# Altium PCB SAMV71_Xplained_Ultra.PcbDoc (part 6 of 7)
Units mm, origin at the board's own origin, x right, y up, seen from the top; angles counter-clockwise.
Board outline 90 x 135 mm, 8 copper layers (Top Layer LF-Signals, Ground Plane 1 (GND), Power Plane (VCC), Ground Plane 2 (GND), Signal Layer 1, Signal Layer 2, Ground Plane 3 (GND), Bottom Layer LF-Signals), stack 1.588 mm thick; 413 components, 342 nets, 1839 pads, 978 vias.
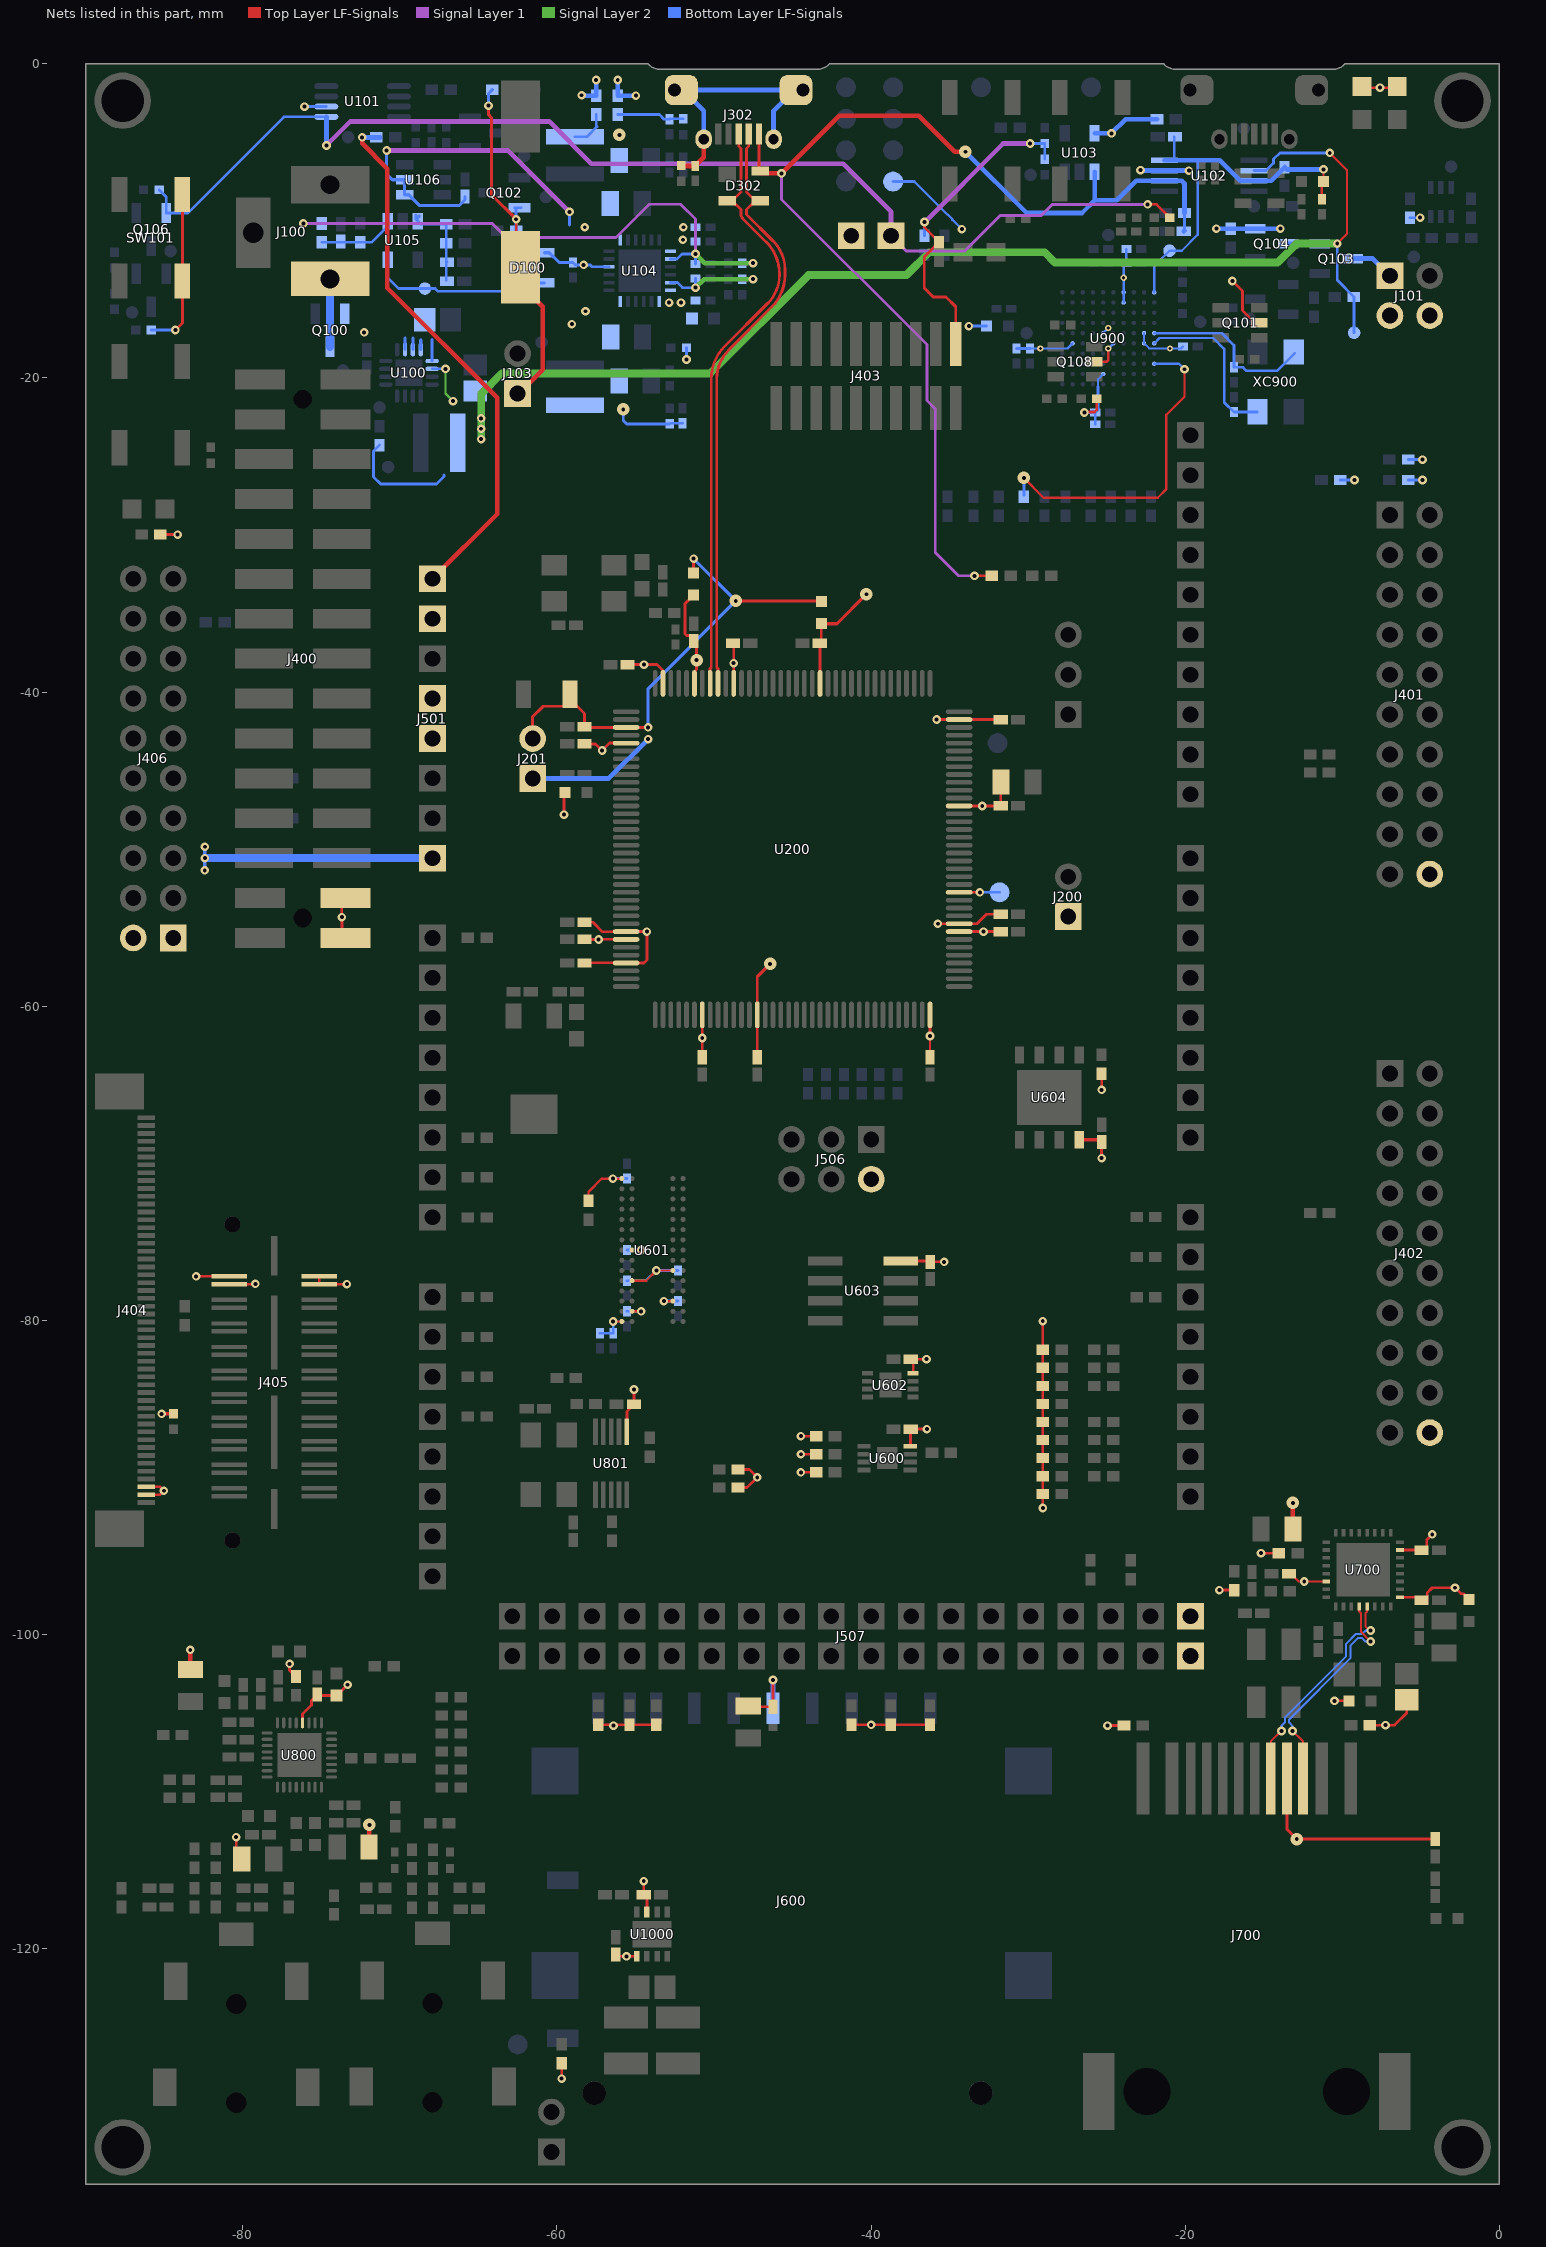
[diagram p12: the nets of this part, all layers, seen from the top]

## Via types
v1: diameter 0.55, hole 0.25, Top Layer LF-Signals to Bottom Layer LF-Signals, 557 vias
v2: diameter 0.55, hole 0.25, Top Layer LF-Signals to Bottom Layer LF-Signals, tented both sides, 190 vias
v3: diameter 0.55/0.55/0.55/0.8 (per signal layer), hole 0.25, Top Layer LF-Signals to Bottom Layer LF-Signals, tented top, 172 vias
v4: diameter 0.55, hole 0.25, Top Layer LF-Signals to Bottom Layer LF-Signals, tented top, 21 vias
v5: diameter 0.4, hole 0.2, Top Layer LF-Signals to Bottom Layer LF-Signals, tented both sides, 16 vias
v6: diameter 0.7, hole 0.35, Top Layer LF-Signals to Bottom Layer LF-Signals, 9 vias
v7: diameter 0.4, hole 0.2, Top Layer LF-Signals to Bottom Layer LF-Signals, tented top, 5 vias
v8: diameter 0.66, hole 0.33, Top Layer LF-Signals to Bottom Layer LF-Signals, tented top, 4 vias
v9: diameter 0.55/0.55/0.55/0.8 (per signal layer), hole 0.25, Top Layer LF-Signals to Bottom Layer LF-Signals, 2 vias
v10: diameter 0.4, hole 0.2, Top Layer LF-Signals to Bottom Layer LF-Signals, 2 vias

## Nets (pads, with @x,y where several pads share a name; then routed paths per layer and width w, separated by ;. In a path a pad name is that pad's centre, name@x,y a point inside that pad or via, vN(x,y) a via of type N, cw(c..) or ccw(c..) an arc to the next point about the centre after c; other vN are vias at no path point) (continued)
TARGET_USB_N: D302.3 J302.2 U200.136 | length 38.2
  Top Layer LF-Signals w0.175: -49.823,-38.437 -49.823,-20.036 cw(c-47.283,-20.036) -49.08,-18.239 -46.334,-15.494 ccw(c-48.376,-13.452) -45.488,-13.452 -45.488,-13.092 ccw(c-48.028,-13.092) -46.232,-11.296 -47.935,-9.593 -47.935,-9.286 D302.3@-47.465,-8.816 ; U200.136@-49.75,-39.45 U200.136@-49.75,-38.616 ; J302.2@-47.784,-4.475 -47.784,-5.238 -47.935,-5.389 -47.935,-8.17 -47.465,-8.641 -47.146,-8.641 D302.3@-47.059,-8.728
  Top Layer LF-Signals w0.18: -49.823,-38.437 -49.75,-38.51 U200.136@-49.75,-38.616
TARGET_USB_P: D302.2 J302.3 U200.137 | length 38.7
  Top Layer LF-Signals w0.175: U200.137@-50.25,-39.45 -50.25,-38.616 cw(c-49.999,-38.616) -50.176,-38.439 -50.176,-38.436 -50.176,-20.041 cw(c-47.288,-20.041) -49.331,-17.998 -46.58,-15.248 ccw(c-48.376,-13.452) -45.836,-13.452 -45.836,-13.381 ccw(c-48.724,-13.381) -46.682,-11.338 -48.181,-9.839 cw(c-47.935,-9.593) -48.283,-9.593 -48.283,-9.286 D302.2@-48.753,-8.816 ; D302.2@-48.873,-8.898 ccw(c-49.071,-9.096) -49.071,-8.816 D302.2@-49.159,-8.728 -49.071,-8.641 D302.2@-48.794,-8.641 ; D302.2@-48.753,-8.641 -48.283,-8.17 -48.283,-5.389 -48.434,-5.238 J302.3@-48.434,-4.475
  Top Layer LF-Signals w0.18: U200.137@-50.25,-38.616 -50.25,-38.51 -50.176,-38.436
TARGET_USB_SHIELD: C304.2 J302.6@-44.347,-1.675 J302.7@-52.522,-1.675 J302.8@-46.209,-4.8 J302.9@-50.659,-4.8 R304.2 | length 18.5
  Top Layer LF-Signals w0.3: R304.2@-52.1,-6.478 -52.075,-6.503 C304.2@-51.2,-6.503 -50.659,-5.962 J302.9@-50.659,-4.8
  Bottom Layer LF-Signals w0.3: J302.7@-52.522,-1.675 J302.6@-44.347,-1.675 ; J302.7@-52.042,-1.617 -50.659,-3 J302.9@-50.659,-4.8 ; J302.8@-46.209,-4.8 -46.209,-3 J302.6@-44.826,-1.617
TCT: C705.1 J700.4 | length 12.9
  Top Layer LF-Signals w0.175: J700.4@-13.525,-109.175 -13.525,-112.4 v3(-12.9,-113.025) C705.1@-4.075,-113.025
TRACESWO: R921.1 U900.A3 | length 21.1
  Top Layer LF-Signals w0.15: v3(-30.275,-26.368) -29.018,-27.625 -21.75,-27.625 -21.2,-27.075 -21.2,-22.347 -20.05,-21.197 v1(-20.05,-19.45)
  Bottom Layer LF-Signals w0.15: U900.A3@-21.975,-19.1 -20.4,-19.1 v1(-20.05,-19.45)
  Bottom Layer LF-Signals w0.175: R921.1@-30.275,-27.468 v3(-30.275,-26.368)
TST: TP200.1 U200.85 | length 2.6
  Top Layer LF-Signals w0.175: U200.85@-34.4,-52.75 v1(-33.075,-52.75)
  Bottom Layer LF-Signals w0.175: v1(-33.075,-52.75) TP200.1@-31.825,-52.75
TX_N: J700.5 U700.5 | length 14.2
  Top Layer LF-Signals w0.127: J700.5@-14.545,-109.175 -14.545,-106.812 v1(-13.875,-106.142) ; U700.5@-8.425,-98.225 -8.425,-98.538 -8.537,-98.65 -8.537,-99.475 -8.262,-99.75 v1(-8.2,-99.75)
  Bottom Layer LF-Signals w0.127: v1(-13.875,-106.142) -13.875,-105.817 -13.664,-105.605 -13.664,-105.298 -9.762,-101.396 -9.762,-100.594 -9.13,-99.961 -8.736,-99.961 -8.525,-99.75 v1(-8.2,-99.75)
TX_P: J700.3 U700.4 | length 14.5
  Top Layer LF-Signals w0.127: v1(-13.175,-106.142) -12.505,-106.812 J700.3@-12.505,-109.175 ; U700.4@-8.925,-98.225 -8.925,-98.538 -8.814,-98.65 -8.814,-99.836 v1(-8.2,-100.45)
  Bottom Layer LF-Signals w0.127: v1(-13.175,-106.142) -13.175,-105.817 -13.387,-105.605 -13.387,-105.412 -9.485,-101.511 -9.485,-100.708 -9.015,-100.238 -8.736,-100.238 -8.525,-100.45 v1(-8.2,-100.45)
V+: C125.2 R135.2 R136.1 U105.1 | length 5
  Bottom Layer LF-Signals w0.175: R136.1@-74.983,-11.369 -71.821,-11.369 -70.771,-10.319 U105.1@-70.771,-10.013
V-: C123.1 C124.2 R105.1 R111.2 U105.3 | length 6.1
  Bottom Layer LF-Signals w0.175: U105.3@-68.865,-10.013 -68.662,-10.217 R105.1@-67.058,-10.217 ; C123.1@-67.058,-12.571 C123.1@-67.008,-12.621 ; C124.2@-67.056,-13.784 R105.1@-67.056,-10.216
  Bottom Layer LF-Signals w0.18: U105.3@-68.967,-9.9 U105.3@-68.967,-9.617
  Bottom Layer LF-Signals w0.2: U105.3@-68.967,-9.9 U105.3@-68.767,-9.7
V_SUPERCAP: C103.1 D100.2 J103.1@-62.51,-20.987 Q102.2 R104.2 R108.2 | length 26.3
  Top Layer LF-Signals w0.175: C103.1@-62.666,-11.559 -62.6,-11.494 v1(-62.6,-9.9)
  Top Layer LF-Signals w0.2: v1(-64.356,-2.665) -64.356,-3.25 -64.179,-3.427 -64.179,-8.321 v1(-62.6,-9.9)
  Top Layer LF-Signals w0.3: J103.1@-62.51,-20.987 -62.414,-20.987 -60.904,-19.477 -60.904,-15.459 -62.325,-14.037 C103.1@-62.325,-12.95
  Bottom Layer LF-Signals w0.18: Q102.2@-62.298,-9.168 Q102.2@-62.398,-9.168 -62.685,-9.168 -62.6,-9.254 v1(-62.6,-9.9) R104.2@-62.6,-10.625 -62.6,-11.579 -61.798,-12.381 -61.798,-13.306 -61.148,-13.956 D100.2@-60.798,-13.956
  Bottom Layer LF-Signals w0.2: v1(-64.356,-2.665) -64.356,-1.889 R108.2@-64.118,-1.65
VBAT: J501.1@-67.93,-32.794 R112.1 | length 34.5
  Top Layer LF-Signals w0.3: v1(-72.402,-4.687) -72.402,-5.073 -70.8,-6.675 -70.8,-14.275 -63.8,-21.275 -63.8,-28.664 J501.1@-67.93,-32.794
  Bottom Layer LF-Signals w0.3: v1(-72.402,-4.687) -71.262,-4.687 R112.1@-71.25,-4.675
VCC_BACKUP_P3V3: J102.2 Q106.2 R106.2 R127.2 U101.1 | length 76.5
  Top Layer LF-Signals w0.175: v1(-22.4,-8.95) -21.825,-8.95 R106.2@-20.975,-9.8
  Signal Layer 1 w0.2: J102.2@-38.73,-10.95 -37.75,-11.93 -34.055,-11.93 -31.786,-9.662 -29.162,-9.662 -28.45,-8.95 v1(-22.4,-8.95)
  Signal Layer 1 w0.3: v1(-74.675,-5.2) -73.146,-3.671 -60.504,-3.671 -57.811,-6.364 -41.786,-6.364 -38.73,-9.42 J102.2@-38.73,-10.95
  Bottom Layer LF-Signals w0.175: R127.2@-85.325,-8.025 -84.875,-8.475 Q106.2@-84.875,-9.5 -83.5,-9.5 -77.375,-3.375 U101.1@-74.687,-3.375 ; v1@-74.687,-5.2 -74.687,-5.213 -74.675,-5.225 v1(-74.675,-5.2)
  Bottom Layer LF-Signals w0.3: U101.1@-74.687,-3.375 -74.675,-3.387 v1(-74.675,-5.2)
VCC_EDBG_P3V3: C909.1 C910.1 C911.1 C912.1 C913.1 C914.1 C915.1 D900.2 D901.2 L901.1 Q101.2 Q108.2 R141.2 R901.2 R902.2 R903.2 R906.2 R920.1 TP907.1 U900.B5 U900.B6 U900.D9 U900.D10 U900.E5 U900.F2 U900.F6 U900.J5 | length 36.9
  Top Layer LF-Signals w0.175: v2(-26.425,-22.2) -26.462,-22.162 -25.77,-22.162 -25.632,-22.024 R141.2@-25.632,-21.324 ; Q108.2@-25.807,-18.968 -25.018,-18.968 -24.9,-18.85 v5(-24.9,-18.125) ; v1(-17,-13.825) -16.35,-14.475 -16.35,-15.699 -15.553,-16.495 Q101.2@-15.287,-16.495 ; D900.2@-8.756,-1.518 v4(-7.6,-1.518) D901.2@-6.47,-1.518
  Bottom Layer LF-Signals w0.125: -27.972,-18.125 -27.5,-18.125 ; -25.55,-20.565 -25.55,-20.075 U900.F2@-25.225,-19.75 ; U900.B6@-22.625,-17.15 U900.B5@-22.625,-17.8 -22.3,-18.125 -21.828,-18.125
  Bottom Layer LF-Signals w0.15: -37.25,-7.5 -35.15,-9.6 -35.118,-9.6 -34.825,-9.893 -34.825,-9.925 v1(-34.225,-10.525) ; C913.1@-29.875,-18.125 v7(-29.225,-18.125) -27.972,-18.125 ; -27.5,-18.125 U900.J5@-27.175,-17.8 ; U900.D9@-23.925,-15.2 U900.D10@-23.925,-14.55 v10(-23.925,-13.625) -23.925,-12.875 C910.1@-23.75,-12.7 ; -21.828,-18.125 v7(-20.975,-18.125) -20.275,-18.125 C911.1@-20.15,-18
  Bottom Layer LF-Signals w0.175: TP907.1@-38.6,-7.5 -37.25,-7.5 ; v2(-33.775,-16.7) L901.1@-32.65,-16.7 ; C914.1@-30.75,-18.125 C913.1@-29.875,-18.125 ; v2(-26.425,-22.2) C912.1@-25.725,-22.2 ; C915.1@-25.725,-22.95 C912.1@-25.725,-22.2 ; -25.55,-20.565 -25.55,-22.025 C912.1@-25.725,-22.2 ; U900.F6@-25.225,-17.15 v5(-24.9,-16.825) ; v5(-24.9,-18.125) U900.E5@-24.575,-17.8 ; C910.1@-23.75,-12.7 C909.1@-23.75,-11.8 ; R901.2@-10.125,-26.5 v4(-9.225,-26.5) ; R903.2@-5.8,-26.5 v4(-4.9,-26.5) ; R902.2@-5.8,-25.2 v4(-4.9,-25.2) ; R906.2@-5.7,-9.8 v4(-5.05,-9.8)
  Bottom Layer LF-Signals w0.3: v1(-56.132,-1.03) R920.1@-56.132,-2.03 v1(-54.982,-2.03)
VCC_EDBG_USB_P5V0: C105.1 C908.1 L900.2 pad.3@-21,-11.9 R116.2 U102.3 U102.8 U900.A10 | length 24.5
  Top Layer LF-Signals w0.15: C908.1@-11.3,-8.625 -11.3,-7.6 L900.2@-11.2,-7.5 v4@-11.2,-6.775
  Bottom Layer LF-Signals w0.15: U900.A10@-21.975,-14.55 -21.975,-12.875 pad.3@-21,-11.9 -20.225,-11.9 -19.2,-10.875 -19.2,-6.15
  Bottom Layer LF-Signals w0.175: U102.8@-20.7,-6.15 C105.1@-20.7,-4.65
  Bottom Layer LF-Signals w0.3: U102.8@-21.325,-6.15 -20.7,-6.15 -19.2,-6.15 -17.8,-6.15 -16.5,-7.45 U102.3@-15.625,-7.45 -14.525,-7.45 R116.2@-13.675,-6.6 ; R116.2@-13.675,-6.575 -13.525,-6.725 v4(-11.2,-6.725)
VCC_EXT_P5V0: J101.1@-6.97,-13.49 Q103.3 | length 3
  Signal Layer 2 w0.3: J101.1@-6.97,-13.49 J101.1@-6.97,-13.35
  Bottom Layer LF-Signals w0.3: Q103.3@-9.35,-12.4 -8.068,-12.4 J101.1@-6.978,-13.49
VCC_EXT_P5V0_P14V0: C101.1 J405.40 J501.8@-67.93,-50.574 Q100.2 U100.10 U100.11 U100.12 U100.13 | length 21.6
  Top Layer LF-Signals w0.175: v4(-82.975,-77.2) J405.40@-80.87,-77.2
  Bottom Layer LF-Signals w0.2: v1(-82.425,-51.35) -82.425,-50.577 v1(-82.422,-50.574) v1(-82.422,-49.848) ; U100.10@-69.675,-18.2 -69.675,-17.45 ; U100.11@-69.175,-18.2 -69.175,-17.473 ; -68.685,-17.575 -68.675,-17.585 U100.12@-68.675,-18.2 ; U100.13@-67.95,-18.925 -67.95,-17.57
  Bottom Layer LF-Signals w0.5: v1(-82.422,-50.574) J501.8@-67.93,-50.574
  other v1: -72.275,-17.1
VCC_IN_P5V0: C100.1 L100.2 pad.3@-9.25,-17.125 Q103.2 Q104.3 R101.1 R115.2 U100.14 U102.2 | length 93.4
  Top Layer LF-Signals w0.15: v4(-10.8,-5.675) -9.7,-6.775 -9.7,-10.825 v4@-10.3,-11.425 ; v4@-10.475,-11.425 v4@-10.3,-11.425 ; v4(-10.325,-11.45) v4@-10.3,-11.425
  Signal Layer 2 w0.15: v1(-67.1,-19.425) -67.1,-21 v1(-66.625,-21.475)
  Signal Layer 2 w0.5: v1(-64.825,-23.9) v1(-64.825,-23.237) v1(-64.825,-22.575) -64.825,-21.025 -63.508,-19.708 -50.239,-19.708 -43.98,-13.45 -37.75,-13.45 -36.3,-12 -28.95,-12 -28.3,-12.65 -14.12,-12.65 -12.92,-11.45 v4(-10.325,-11.45)
  Bottom Layer LF-Signals w0.15: U100.14@-67.95,-19.425 v1(-67.1,-19.425)
  Bottom Layer LF-Signals w0.175: U102.2@-15.625,-6.8 -14.85,-6.8 -14.375,-6.325 -14.375,-6.075 -13.975,-5.675 v4(-10.8,-5.675) ; v4(-10.325,-11.45) -10.325,-13.775 -9.25,-14.85 pad.3@-9.25,-17.125
  Bottom Layer LF-Signals w0.18: R101.1@-71.3,-24.275 -71.675,-24.65 -71.675,-26.3 -71.225,-26.75 -67.675,-26.75 -67.2,-26.275 -67.2,-26.19
  Bottom Layer LF-Signals w0.3: Q104.3@-13.45,-11.45 Q103.2@-11.45,-11.45 v4(-10.325,-11.45)
VCC_MCU_P3V3: C200.1 C201.1 C202.1 C203.1 C204.1 C205.1 C206.1 C207.1 C216.1 J102.1 L200.1 U200.5 U200.30 U200.43 U200.72 U200.80 U200.96 U200.134 U200.143 | length 25.1
  Top Layer LF-Signals w0.15: C203.1@-36.25,-63.25 v1(-36.25,-61.9)
  Top Layer LF-Signals w0.18: v1(-59.55,-47.8) L200.1@-59.55,-46.4 ; C201.1@-58.25,-55.75 v1(-57.35,-55.75) -57.335,-55.735 -55.6,-55.735 U200.30@-55.6,-55.75 ; C200.1@-58.25,-43.3 -57.551,-43.3 v1(-57.128,-43.723) -56.656,-43.25 U200.5@-55.6,-43.25 ; C207.1@-55.5,-38.25 v1(-54.456,-38.25) -53.625,-38.25 -53.25,-38.625 U200.143@-53.25,-39.45 ; C202.1@-50.75,-63.25 v1(-50.75,-62.025) U200.43@-50.75,-60.55 ; U200.134@-48.75,-39.45 v1(-48.75,-38.162) C206.1@-48.75,-36.875 ; v1(-36.25,-61.9) U200.72@-36.25,-60.55 ; U200.80@-34.4,-55.25 v1(-32.85,-55.25) C204.1@-31.75,-55.25 ; U200.96@-34.4,-47.25 v1(-32.925,-47.25) C205.1@-31.75,-47.25 C216.1@-31.75,-45.75
VCC_P1V2: C120.1 C710.1 C711.1 C712.1 L701.1 R132.2 U104.23 U700.9 U700.30 | length 16.6
  Top Layer LF-Signals w0.15: C711.1@-13.4,-96.125 -13.275,-96.125 -12.775,-96.625 v1(-12.425,-96.625) U700.30@-11.025,-96.625
  Top Layer LF-Signals w0.175: U700.9@-6.325,-97.625 -5.15,-97.625 C710.1@-4.95,-97.825 -4.662,-97.825 -4.6,-97.887 -4.6,-97.35 -4.275,-97.025 v1(-2.825,-97.025) -2.45,-97.4 -2.3,-97.4 L701.1@-1.925,-97.775
  Top Layer LF-Signals w0.3: C712.1@-13.15,-93.275 v3(-13.15,-91.625)
  Signal Layer 2 w0.3: v1(-51.182,-14.255) -50.638,-13.711 v1(-47.519,-13.711)
  Bottom Layer LF-Signals w0.175: U104.23@-52.782,-13.93 -52.332,-13.93 -52.007,-14.255 v1(-51.182,-14.255) C120.1@-51.182,-13.661 ; R132.2@-48.207,-13.711 v1(-47.519,-13.711)
VCC_P1V8: C119.1 L805.1 L806.1 R128.2 R136.2 R819.1 U104.20 | length 40.6
  Top Layer LF-Signals w0.175: v1(-77.025,-101.875) -77.025,-102.275 R819.1@-76.625,-102.675
  Top Layer LF-Signals w0.3: v1(-83.35,-100.975) -83.35,-102.209 L806.1@-83.325,-102.234 ; L805.1@-71.959,-113.525 -71.959,-112.134 v3(-71.95,-112.125)
  Signal Layer 1 w0.175: v1(-76.15,-10.169) -64.12,-10.169 -63.231,-11.058 -56.239,-11.058 -54.131,-8.95 -52.121,-8.95 -51.182,-9.889 v1(-51.182,-12.105)
  Signal Layer 2 w0.3: v1(-51.182,-12.105) -50.594,-12.692 v1(-47.519,-12.692)
  Bottom Layer LF-Signals w0.175: v1(-76.15,-10.169) R136.2@-74.983,-10.169 ; U104.20@-52.782,-12.43 -52.357,-12.43 -52.032,-12.105 v1(-51.182,-12.105) C119.1@-51.182,-12.742 ; R128.2@-48.207,-12.692 v1(-47.519,-12.692)
VCC_P2V0: C114.1 C115.1 L101.2 R122.2 | length 4.5
  Bottom Layer LF-Signals w0.175: v3(-55.782,-22.005) -55.782,-22.705 -55.557,-22.93 R122.2@-52.832,-22.93 ; R122.2@-52.782,-22.88 C114.1@-52.007,-22.88
VCC_P3V3: C116.1 C117.1 L102.2 R100.1 R124.2 R920.2 | length 6.8
  Bottom Layer LF-Signals w0.175: L102.2@-58.857,-4.645 -58.097,-4.645 -57.457,-4.005 -57.507,-3.955 R100.1@-57.507,-3.23 ; R920.2@-56.132,-3.23 -53.482,-3.23 -53.182,-3.53 C116.1@-52.832,-3.53 ; C116.1@-52.832,-3.505 R124.2@-51.957,-3.505
  other v3: -56.032,-4.53
VCC_P5V0: C107.1 C108.1 C109.1 C110.1 C111.1 C112.1 C113.1 C121.1 C1002.1 D100.1 J101.3@-6.97,-16.03 J501.5@-67.93,-42.954 J506.2@-39.99,-71.021 J507.1 J507.2 Q104.2 R113.2 R114.2 R125.2 SW101.3 SW101.4 U102.7 U103.5 U104.1 U104.6 U104.10 U104.13 U104.19 U104.24 U106.4 U106.5 U1000.3 | length 50.7
  Top Layer LF-Signals w0.175: v1(-84.3,-16.95) -83.85,-16.5 SW101.3@-83.85,-13.825 SW101.4@-83.85,-8.325
  Top Layer LF-Signals w0.18: v1(-54.475,-115.705) C1002.1@-54.475,-116.58 -54.275,-116.78 U1000.3@-54.275,-117.668
  Signal Layer 1 w0.3: v1(-70.85,-5.525) -63.112,-5.525 v1(-59.207,-9.43)
  Bottom Layer LF-Signals w0.175: R125.2@-85.825,-16.95 v1(-84.3,-16.95) ; C108.1@-58.982,-12.655 -58.832,-12.805 v1(-58.307,-12.805) -57.882,-12.805 -57.757,-12.93 U104.10@-56.682,-12.93
  Bottom Layer LF-Signals w0.2: v1(-70.85,-5.525) -70.85,-7.02 -70.483,-7.387 U106.5@-69.699,-7.387 U106.4@-69.699,-8.337 -69.435,-8.337 -68.741,-9.03 -66.241,-9.03 -65.857,-8.646 C121.1@-65.857,-8.459 ; D100.1@-60.798,-12.031 -60.488,-12.031 -59.864,-12.655 C108.1@-58.982,-12.655 ; -59.207,-10.255 v1(-59.207,-9.43)
  Bottom Layer LF-Signals w0.3: U103.5@-25.772,-4.425 v1(-24.7,-4.425) -23.8,-3.525 R113.2@-21.8,-3.525 ; v1(-22.85,-6.775) -22.825,-6.8 U102.7@-21.325,-6.8 v1(-19.775,-6.8) ; v1(-18.025,-10.5) R114.2@-17.1,-10.5 Q104.2@-15.55,-10.5 v1(-13.95,-10.5)
  other v1: -59.057,-16.58 -58.182,-15.755 -52.857,-15.205 -52.107,-15.205 -51.982,-11.205 -58.232,-10.405 -51.957,-10.405
VCC_TARGET_P3V3: C600.1 C601.1 C602.1 C603.1 C604.1 C605.1 C606.1 C607.1 C608.1 C609.1 C610.1 C611.1 C612.1 C613.1 C702.1 C703.1 C818.1 C819.1 C822.1 C1003.1 J101.4@-4.43,-16.03 J200.1@-27.442,-54.295 J400.1@-73.467,-55.654 J400.3 J401.20@-4.43,-51.59 J402.20@-4.43,-87.15 J403.1 J404.48 J404.49 J405.37 J405.38 J405.39 J406.1@-84.44,-55.654 J406.2@-86.98,-55.654 J501.2@-67.93,-35.334 J501.4@-67.93,-40.414 J600.4 L700.1 L804.1 R100.2 R102.2 R120.1 R121.2 R134.2 R231.1 R232.1 R302.2 R303.2 R404.1 R600.2 R601.2 R602.2 R604.1 R605.1 R606.2 R607.2 R608.2 R609.2 R610.2 R611.2 R612.2 R700.2 R701.2 R702.2 R703.1 R705.2 R706.2 R707.2 R708.2 R709.2 R710.2 R711.2 R712.2 R713.2 U101.2 U600.8 U601.A7 U601.B6 U601.C2 U601.E6 U601.F2 U601.H6 U601.R7 U602.8 U603.8 U604.8 U700.15 U800.4 U801.1 U1000.5 | length 116.7
  Top Layer LF-Signals w0.15: R604.1@-57.997,-72.4 -57.997,-71.822 -57.15,-70.975 U601.R7@-55.872,-70.975 ; v1(-56.422,-80.075) U601.A7@-55.872,-80.075 ; U601.B6@-55.222,-79.425 v1(-54.647,-79.425) ; U601.E6@-55.222,-77.475 -54.322,-77.475 v1(-53.672,-76.825) U601.F2@-52.622,-76.825 ; U601.H6@-55.222,-75.525 v1(-54.647,-75.525) ; v1(-53.197,-78.775) U601.C2@-52.622,-78.775
  Top Layer LF-Signals w0.175: J404.49@-86.15,-91.1 -85.275,-91.1 v1(-85.025,-90.85) -85.275,-90.6 J404.48@-86.15,-90.6 ; R302.2@-85.25,-29.969 -84.156,-29.969 v1(-84.15,-29.975) ; J405.38@-80.87,-77.7 -79.225,-77.7 v1(-79.2,-77.675) ; v1(-80.425,-112.9) -80.425,-113.941 L804.1@-80.066,-114.3 ; U800.4@-76.2,-105.625 -76.2,-105.075 -75.625,-104.5 -75.625,-104.208 C818.1@-75.25,-103.833 C818.1@-75.25,-103.881 ; C818.1@-75.273,-103.881 C818.1@-75.25,-103.881 ; C818.1@-75.25,-104.125 C818.1@-75.25,-103.881 ; J405.39@-75.13,-77.2 J405.37@-75.13,-77.7 v1(-73.375,-77.7) ; v1@-73.697,-54.328 J400.3@-73.697,-53.075 ; v1(-73.694,-54.331) -73.694,-55.427 J400.1@-73.467,-55.654 ; v1(-73.325,-103.2) -74.006,-103.881 C819.1@-74.025,-103.881 C818.1@-75.25,-103.881 ; v1(-59.7,-128.275) R612.2@-59.7,-127.3 ; -57.005,-105.75 R609.2@-55.378,-105.75 R610.2@-53.678,-105.75 ; C1003.1@-56.25,-120.38 -56.138,-120.492 v1(-55.575,-120.492) U1000.5@-54.925,-120.492 ; U801.1@-55.55,-87.1 -55.55,-85.8 C822.1@-55.1,-85.35 v1(-55.1,-84.4) ; R232.1@-48.475,-90.65 -47.9,-90.65 v1(-47.25,-90) -47.75,-89.5 R231.1@-48.475,-89.5 ; C612.1@-47.823,-104.55 -47.773,-104.6 C613.1@-46.248,-104.6 v1(-46.248,-102.9) ; v1(-44.475,-89.675) R600.2@-43.5,-89.675 ; v1(-44.475,-88.525) R601.2@-43.5,-88.525 ; v1(-44.475,-87.375) R602.2@-43.5,-87.375 ; R606.2@-41.253,-105.75 R607.2@-38.753,-105.75 R608.2@-36.253,-105.75 ; U603.8@-38.125,-76.22 -36.28,-76.22 C602.1@-36.225,-76.275 v1(-35.35,-76.275) ; U600.8@-37.5,-88.025 C600.1@-37.5,-86.95 ; C600.1@-37.475,-86.925 v1(-36.45,-86.925) ; U602.8@-37.325,-83.375 -37.325,-82.625 C601.1@-37.475,-82.475 v1(-36.475,-82.475) ; v1(-36.6,-10.075) -36.6,-10.425 R303.2@-35.675,-11.35 ; v1(-29.075,-80.05) -29.069,-80.056 R709.2@-29.069,-81.873 R708.2@-29.069,-83.023 R707.2@-29.069,-86.473 R706.2@-29.069,-87.623 R713.2@-29.069,-88.773 R710.2@-29.069,-89.923 R700.2@-29.069,-91.048 v1(-29.069,-91.944) ; v1(-25.325,-65.325) R605.1@-25.325,-64.3 ; v1(-24.95,-105.8) R703.1@-23.9,-105.8 ; v1(-17.825,-97.175) R702.2@-16.875,-97.175 ; v1(-15.175,-94.825) R712.2@-14.05,-94.825 ; v1(-10.5,-104.225) L700.1@-9.575,-104.225 ; R701.2@-8.25,-105.775 v1(-7.25,-105.775) -6.675,-105.775 -5.9,-105 C703.1@-5.9,-104.15 ; U700.15@-6.325,-94.625 C702.1@-4.95,-94.625 -4.75,-94.625 -4.625,-94.5 -4.625,-93.975 v1(-4.275,-93.625)
  Top Layer LF-Signals w0.18: R303.2@-35.675,-11.35 -36.616,-12.291 -36.616,-14.275 -36.048,-14.843 -35.233,-14.843 -34.61,-15.466 J403.1@-34.61,-17.84
  Top Layer LF-Signals w0.2: v1@-85.15,-85.95 -84.418,-85.95 R404.1@-84.414,-85.946 ; U604.8@-26.745,-68.5 C611.1@-25.475,-68.5 ; v1(-25.325,-69.675) C611.1@-25.325,-68.65
  Top Layer LF-Signals w0.3: C611.1@-25.475,-68.5 C611.1@-25.325,-68.65
  Signal Layer 1 w0.3: v1(-36.6,-10.075) -31.6,-5.075 v1(-29.875,-5.075)
  Bottom Layer LF-Signals w0.175: v1(-76.075,-2.725) U101.2@-74.687,-2.725 ; C603.1@-57.272,-80.825 C604.1@-56.422,-80.825 v1(-56.422,-80.075) ; v1(-56.447,-70.975) C610.1@-55.547,-70.975 ; C605.1@-55.547,-79.425 v1(-54.647,-79.425) ; C608.1@-55.547,-77.475 -54.322,-77.475 v1(-53.672,-76.825) C607.1@-52.297,-76.825 ; C609.1@-55.547,-75.525 v1(-54.647,-75.525) ; v1(-53.197,-78.775) C606.1@-52.297,-78.775 ; v1(-51.757,-18.83) R134.2@-51.757,-18.08 ; R102.2@-36.6,-10.95 v1(-36.6,-10.075) ; v1(-29.875,-5.075) R121.2@-28.95,-5.075 R120.1@-28.95,-6.075
  Bottom Layer LF-Signals w0.3: v1(-58.432,-2.005) -58.407,-2.03 R100.2@-57.507,-2.03 v1(-57.507,-1.03) ; J600.4@-46.248,-104.7 v1(-46.248,-102.9)
  other v1: -56.4,-105.8 -40.003,-105.75 -85.175,-85.95
VCC_TARGET_USB_P5V0: C106.1 D302.4 J302.1 R117.2 R305.2 U102.6 U103.1 | length 71.9
  Top Layer LF-Signals w0.175: J302.1@-47.134,-4.475 -47.134,-6.903 D302.4@-47.059,-6.978
  Top Layer LF-Signals w0.18: v1@-33.425,-32.594 v1(-33.419,-32.6) R305.2@-32.315,-32.6
  Top Layer LF-Signals w0.3: D302.4@-47.059,-6.978 v1(-45.703,-6.978) -42.025,-3.3 -36.975,-3.3 -34.675,-5.6 v3(-34,-5.6)
  Signal Layer 1 w0.18: v1(-45.703,-6.978) -45.703,-8.631 -36.452,-17.882 -36.452,-21.439 -35.918,-21.972 -35.918,-31.106 -34.425,-32.6 v1(-33.419,-32.6)
  Bottom Layer LF-Signals w0.175: C106.1@-20.05,-10.625 R117.2@-20.05,-9.5
  Bottom Layer LF-Signals w0.3: v3(-34,-5.6) -30.1,-9.5 -26.575,-9.5 -25.772,-8.697 ; U103.1@-25.772,-6.875 -25.772,-8.697 ; C106.1@-20.1,-10.675 C106.1@-20.05,-10.625 ; R117.2@-20.05,-9.5 -20.05,-7.625 -20.225,-7.45 U102.6@-21.325,-7.45 -23.125,-7.45 -24.372,-8.697 -25.772,-8.697
VDDCORE: C209.1 C210.1 C211.1 C212.1 C213.1 J201.1@-61.55,-45.5 U200.29 U200.33 U200.50 U200.81 U200.107 | length 33.1
  Top Layer LF-Signals w0.175: U200.107@-34.4,-41.75 C213.1@-31.75,-41.75
  Top Layer LF-Signals w0.18: C210.1@-58.25,-57.25 -58.25,-57.238 -55.612,-57.238 U200.33@-55.6,-57.25 -54.475,-57.25 -54.275,-57.05 v1(-54.275,-55.25) U200.29@-55.6,-55.25 -55.6,-55.265 -57.107,-55.265 -57.137,-55.235 -57.14,-55.235 -57.725,-54.65 C209.1@-58.25,-54.65 ; C211.1@-47.25,-63.25 U200.50@-47.25,-60.55 -47.25,-58.125 v3(-46.425,-57.3) ; v1(-35.825,-41.75) U200.107@-34.4,-41.75 ; v1(-35.75,-54.75) -33.25,-54.75 -32.65,-54.15 C212.1@-31.75,-54.15
  Bottom Layer LF-Signals w0.3: J201.1@-61.55,-45.5 -56.7,-45.5 v1(-54.2,-43)
VDDOUT: C208.1 C215.1 J201.2@-61.55,-42.96 L201.1 L202.1 U200.3 | length 31.8
  Top Layer LF-Signals w0.175: C208.1@-58.25,-42.2 -58.187,-42.263 -55.6,-42.263 U200.3@-55.6,-42.25 v1(-54.2,-42.25)
  Top Layer LF-Signals w0.18: J201.2@-61.55,-42.96 -61.55,-41.575 -60.875,-40.9 -59.3,-40.9 -59.175,-40.775 C215.1@-59.175,-40.125 -59.175,-40.45 -58.25,-41.375 C208.1@-58.25,-42.2
  Top Layer LF-Signals w0.2: L202.1@-51.3,-32.426 v1(-51.3,-31.508) ; v3(-48.618,-34.197) -43.228,-34.197 L201.1@-43.175,-34.25
  Bottom Layer LF-Signals w0.2: v1(-54.2,-42.25) -54.2,-39.779 v3(-48.618,-34.197) v1@-51.306,-31.508
VDDPLL: C214.1 L201.2 U200.123 | length 7.5
  Top Layer LF-Signals w0.175: C214.1@-43.275,-36.9 -43.175,-36.8 L201.2@-43.175,-35.65 ; U200.123@-43.25,-39.45 C214.1@-43.25,-36.9
  Top Layer LF-Signals w0.2: L201.2@-43.175,-35.65 -42.175,-35.65 v3(-40.299,-33.774)
VDDUTMIC: C217.1 L202.2 U200.139 | length 6.4
  Top Layer LF-Signals w0.175: L202.2@-51.3,-33.826 -51.853,-34.379 -51.853,-36.297 -51.75,-36.4 -51.465,-36.4 -51.3,-36.565 C217.1@-51.3,-36.75 -51.111,-36.939 v3(-51.111,-37.966) -51.111,-38.563 -51.25,-38.702 U200.139@-51.25,-39.45
VIN: J100.3 Q100.3 | length 4.6
  Bottom Layer LF-Signals w0.5: Q100.3@-74.45,-18.025 J100.3@-74.45,-13.7 J100.3@-74.25,-13.5
VMAX: D100.3 pad.1@-68.411,-14.313 U105.5 | length 11.7
  Bottom Layer LF-Signals w0.175: U105.5@-70.771,-12.463 -70.771,-13.64 -70.098,-14.313 pad.1@-68.411,-14.313 -67.755,-14.313 -67.579,-14.489 -62.631,-14.489 -62.373,-14.231
  Bottom Layer LF-Signals w0.18: D100.3@-62.898,-12.981 -62.51,-12.981 -62.373,-13.118 -62.373,-14.231
XIN0: C900.1 U900.A5 XC900.1 | length 10.6
  Bottom Layer LF-Signals w0.15: U900.A5@-21.975,-17.8 -21.637,-17.462 -18.213,-17.462 -17.525,-18.15
  Bottom Layer LF-Signals w0.175: -17.525,-18.15 -17.525,-21.55 C900.1@-16.9,-22.175 XC900.1@-15.425,-22.175
XOUT0: C901.1 U900.A6 XC900.3 | length 11.2
  Bottom Layer LF-Signals w0.175: U900.A6@-21.975,-17.15 -17.675,-17.15 -16.9,-17.925 C901.1@-16.9,-19.325 -16.325,-19.325 -16.1,-19.55 -14.15,-19.55 XC900.3@-13.025,-18.425
pads on no net: D101.2 J101.1@-6.97,-13.49 J101.2@-4.43,-13.49 J101.3@-6.97,-16.03 J101.4@-4.43,-16.03 J103.1@-62.51,-20.987 J103.2@-62.51,-18.447 J200.1@-27.442,-54.295 J200.2@-27.442,-51.755 J201.1@-61.55,-45.5 J201.2@-61.55,-42.96 J202.1@-27.442,-41.43 J202.2@-27.442,-38.89 J202.3@-27.442,-36.35 J302.6@-44.834,-1.675 J302.7@-52.034,-1.675 J302.8@-46.209,-4.8 J302.9@-50.659,-4.8 J400.0 J400.1@-76.185,-21.364 J401.1@-6.97,-28.73 J401.2@-4.43,-28.73 J401.3@-6.97,-31.27 J401.4@-4.43,-31.27 J401.5@-6.97,-33.81 J401.6@-4.43,-33.81 J401.7@-6.97,-36.35 J401.8@-4.43,-36.35 J401.9@-6.97,-38.89 J401.10@-4.43,-38.89 J401.11@-6.97,-41.43 J401.12@-4.43,-41.43 J401.13@-6.97,-43.97 J401.14@-4.43,-43.97 J401.15@-6.97,-46.51 J401.16@-4.43,-46.51 J401.17@-6.97,-49.05 J401.18@-4.43,-49.05 J401.19@-6.97,-51.59 J401.20@-4.43,-51.59 J402.1@-6.97,-64.29 J402.2@-4.43,-64.29 J402.3@-6.97,-66.83 J402.4@-4.43,-66.83 J402.5@-6.97,-69.37 J402.6@-4.43,-69.37 J402.7@-6.97,-71.91 J402.8@-4.43,-71.91 J402.9@-6.97,-74.45 J402.10@-4.43,-74.45 J402.11@-6.97,-76.99 J402.12@-4.43,-76.99 J402.13@-6.97,-79.53 J402.14@-4.43,-79.53 J402.15@-6.97,-82.07 J402.16@-4.43,-82.07 J402.17@-6.97,-84.61 J402.18@-4.43,-84.61 J402.19@-6.97,-87.15 J402.20@-4.43,-87.15 J403.7 J403.8 J403.11 J403.13 J404.23 J404.24 J404.25 J404.26 J404.28 J404.29 J404.30 J404.31 J404.37 J404.38 J404.39 J404.40 J405.0 J405.1 J405.3 J405.4 J405.5 J405.7 J405.8 J405.9 J405.11 J405.12 J405.13 J405.14 J405.15 J405.17 J405.18 J405.19 J405.20 J405.21 J405.22 J405.23 J405.24 J405.26 J405.28 J405.29 J405.30 J405.31 J405.32 J405.36 J406.1@-84.44,-55.654 J406.2@-86.98,-55.654 J406.3 J406.4@-86.98,-53.114 J406.5 J406.6@-86.98,-50.574 J406.7@-84.44,-48.034 J406.8@-86.98,-48.034 J406.9@-84.44,-45.494 J406.10@-86.98,-45.494 J406.11 J406.12@-86.98,-42.954 J406.13@-84.44,-40.414 J406.14@-86.98,-40.414 J406.15@-84.44,-37.874 J406.16@-86.98,-37.874 J406.17 J406.18@-86.98,-35.334 J406.19 J406.20@-86.98,-32.794 J500.1@-19.67,-46.51 J500.2@-19.67,-43.97 J500.3@-19.67,-41.43 J500.4@-19.67,-38.89 J500.5@-19.67,-36.35 J500.6@-19.67,-33.81 J500.7@-19.67,-31.27 J500.8@-19.67,-28.73 J500.9@-19.67,-26.19 J500.10@-19.67,-23.65 J501.1@-67.93,-32.794 J501.2@-67.93,-35.334 J501.3@-67.93,-37.874 J501.4@-67.93,-40.414 J501.5@-67.93,-42.954 J501.6@-67.93,-45.494 J501.7@-67.93,-48.034 J501.8@-67.93,-50.574 J502.1@-67.93,-55.654 J502.2@-67.93,-58.194 J502.3@-67.93,-60.734 J502.4@-67.93,-63.274 J502.5@-67.93,-65.814 J502.6@-67.93,-68.354 J502.7@-67.93,-70.894 J502.8@-67.93,-73.434 J503.1@-19.67,-68.354 J503.2@-19.67,-65.814 J503.3@-19.67,-63.274 J503.4@-19.67,-60.734 J503.5@-19.67,-58.194 J503.6@-19.67,-55.654 J503.7@-19.67,-53.114 J503.8@-19.67,-50.574 J504.1@-67.93,-78.514 J504.2@-67.93,-81.054 J504.3@-67.93,-83.594 J504.4@-67.93,-86.134 J504.5@-67.93,-88.674 J504.6@-67.93,-91.214 J504.7@-67.93,-93.754 J504.8@-67.93,-96.294 J505.1@-19.67,-91.214 J505.2@-19.67,-88.674 J505.3@-19.67,-86.134 J505.4@-19.67,-83.594 J505.5@-19.67,-81.054 J505.6@-19.67,-78.514 J505.7@-19.67,-75.974 J505.8@-19.67,-73.434 J506.1@-39.99,-68.481 J506.2@-39.99,-71.021 J506.3@-42.53,-68.481 J506.4@-42.53,-71.021 J506.5@-45.07,-68.481 J506.6@-45.07,-71.021 J507.0 J600.0 J700.0 J700.9 J800.0 J800.4 J800.5 J801.0 J801.4 J801.5 J900.4 J900.6@-12,-1.675 J900.7@-19.2,-1.675 J900.8@-13.375,-4.8 J900.9@-17.825,-4.8 J1000.1@-60.35,-132.945 J1000.2@-60.35,-130.405 U100.5 U101.5 U101.6 U101.7 U104.0 U106.3 U600.0 U600.9 U601.G2 U601.G6 U601.H1 U601.H2 U601.H7 U601.J1 U601.K1 U601.L2 U601.L6 U601.M6 U601.M7 U602.1 U602.2 U602.3 U602.7 U603.1 U603.2 U603.3 U603.7 U800.24 U800.26 U801.4 U900.A2 U900.A4 U900.A7 U900.B1 U900.B3 U900.B7 U900.C1 U900.C2 U900.C4 U900.C6 U900.D1 U900.D2 U900.D4 U900.D5 U900.D7 U900.E1 U900.E3 U900.E4 U900.E7 U900.E8 U900.F3 U900.F4 U900.G1 U900.G2 U900.G3 U900.G4 U900.G6 U900.G8 U900.G9 U900.G10 U900.H1 U900.H4 U900.H5 U900.H6 U900.H10 U900.J1 U900.J2 U900.J3 U900.J7 U900.J10 U900.K1 U900.K5 U900.K7

## Polygon pours and split planes (outlines as drawn)
AUDIO_GND on Top Layer LF-Signals "Audio GND" (solid, remove dead copper, pour order 16): -90,-98.175 -62.2,-98.175 -62.2,-134.925 -62.225,-134.95 -89.95,-134.95 -90,-135
RJ45_GND on Top Layer LF-Signals "Ethernet GND" (solid, remove dead copper, pour order 17): -27.075,-106.425 -3.35,-106.425 -3.35,-134.375 -27.075,-134.375
GND on Top Layer LF-Signals "Top Layer GND Fill" (solid, remove dead copper, pour order 26): 0,0 -90,0 -90,-135 0,-135
VCC_EXT_P5V0_P14V0 on Bottom Layer LF-Signals "REG 5V0 IN" (solid, pour order 24): -68.43,-17.675 -68.429,-17.675 -67.65,-17.675 -67.65,-14.925 -73.825,-14.925 -73.825,-17.675
VCC_IN_P5V0 on Bottom Layer LF-Signals "REF 5V0 OUT" (solid, pour order 22): -64.05,-20.125 -64.05,-26.35 -67.375,-26.35 -67.375,-21.65 -66.7,-20.975 -66.15,-20.975 -65.95,-20.975 -65.95,-20.125
NetL100_1 on Bottom Layer LF-Signals "REF 5V0 SW" (solid, pour order 19): -69.925,-21.658 -69.925,-26.35 -67.775,-26.35 -67.775,-21.658
GND on Bottom Layer LF-Signals "REG 5V0 GND" (solid, pour order 18): -67.4,-14.925 -64.05,-14.925 -64.05,-19.825 -66.1,-19.825 -66.1,-20.75 -68.425,-20.75 -68.425,-19.675 -67.4,-19.675 -67.4,-17.425
PAD on Bottom Layer LF-Signals "Top Layer LF-signals-No Net" (solid, remove dead copper, pour order 13): -30.7,-64.05 -26.6,-64.05 -26.6,-67.55 -30.7,-67.55
VCC_P3V3 on Bottom Layer LF-Signals "VCC_Fill" (solid, remove dead copper, pour order 14): -58.307,-4.63 -58.307,-2.805 -58.207,-2.705 -55.407,-2.705 -55.357,-2.755 -55.357,-4.555 -55.432,-4.63
GND on Bottom Layer LF-Signals "Bottom Layer GND Fill" (solid, remove dead copper, pour order 32): 0,0 -90,0 -90,-135 0,-135
no net on Top Overlay "MountingHole_Index" (solid): -4.5,-0.3 -0.3,-0.3 -0.3,-4.5 -4.5,-4.5
GND on Ground Plane 1 (GND) (split plane): -67.577,-21.573 -71.323,-21.573 -71.323,-17.627 -67.577,-17.627
GND on Ground Plane 1 (GND) (split plane): -0.51,-134.49 -89.49,-134.49 -89.49,-0.51 -54.412,-0.51 -54.398,-0.523 -54.256,-0.623 -54.105,-0.707 -53.944,-0.774 -53.778,-0.822 -53.607,-0.851 -53.434,-0.86 -43.434,-0.86 -43.261,-0.851 -43.09,-0.822 -42.924,-0.774 -42.763,-0.707 -42.612,-0.623 -42.47,-0.523 -42.456,-0.51 -21.578,-0.51 -21.564,-0.523 -21.422,-0.623 -21.271,-0.707 -21.11,-0.774 -20.944,-0.822 -20.773,-0.851 -20.6,-0.86 -10.6,-0.86 -10.427,-0.851 -10.256,-0.822 -10.09,-0.774 -9.929,-0.707 -9.778,-0.623 -9.636,-0.523 -9.622,-0.51 -0.51,-0.51
VCC_EDBG_P3V3 on Power Plane (VCC) (split plane): -0.51,-14.57 -0.709,-14.371 -0.741,-14.347 -0.777,-14.332 -0.816,-14.327 -5.842,-14.327 -5.881,-14.332 -5.918,-14.347 -5.949,-14.371 -5.973,-14.402 -5.988,-14.439 -5.993,-14.478 -5.993,-16.958 -5.988,-16.997 -5.973,-17.034 -5.949,-17.065 -4.651,-18.363 -4.651,-27.349 -33.937,-27.349 -35.599,-25.687 -35.599,-8.35 -35.604,-8.311 -35.619,-8.274 -35.643,-8.243 -38.024,-5.862 -38.055,-5.838 -38.07,-5.832 -38.092,-5.823 -38.131,-5.818 -56.686,-5.818 -56.686,-0.51 -54.412,-0.51 -54.398,-0.523 -54.256,-0.623 -54.105,-0.707 -53.944,-0.774 -53.778,-0.822 -53.607,-0.851 -53.434,-0.86 -43.434,-0.86 -43.261,-0.851 -43.09,-0.822 -42.924,-0.774 -42.763,-0.707 -42.612,-0.623 -42.47,-0.523 -42.456,-0.51 -21.578,-0.51 -21.564,-0.523 -21.422,-0.623 -21.271,-0.707 -21.11,-0.774 -20.944,-0.822 -20.773,-0.851 -20.6,-0.86 -10.6,-0.86 -10.427,-0.851 -10.256,-0.822 -10.09,-0.774 -9.929,-0.707 -9.778,-0.623 -9.636,-0.523 -9.622,-0.51 -0.51,-0.51
VDDCORE on Power Plane (VCC) (split plane): -35.151,-59.849 -54.849,-59.849 -54.849,-40.151 -35.151,-40.151
VCC_MCU_P3V3 on Power Plane (VCC) (split plane): -37.451,-10.213 -37.451,-29.6 -37.446,-29.639 -37.437,-29.661 -37.431,-29.676 -37.407,-29.707 -36.357,-30.757 -30.926,-36.188 -30.926,-60.925 -35.025,-65.024 -53.812,-65.024 -61.849,-56.987 -61.849,-40.738 -45.143,-24.032 -45.119,-24.001 -45.115,-23.99 -45.104,-23.964 -45.099,-23.925 -45.099,-10.613 -42.862,-8.376 -39.288,-8.376
VCC_P5V0 on Power Plane (VCC) (split plane): -51.676,-15.787 -58.563,-22.674 -62.837,-22.674 -64.238,-21.273 -64.238,-9.334 -61.03,-6.126 -56.837,-6.126 -56.798,-6.121 -56.796,-6.12 -51.676,-6.12
VCC_TARGET_P3V3 on Power Plane (VCC) (split plane): -56.989,-5.818 -58.42,-5.818 -58.459,-5.823 -58.461,-5.824 -61.093,-5.824 -61.132,-5.829 -61.169,-5.844 -61.2,-5.868 -64.496,-9.164 -64.52,-9.195 -64.535,-9.232 -64.54,-9.271 -64.54,-21.336 -64.535,-21.375 -64.52,-21.412 -64.496,-21.443 -63.007,-22.932 -62.976,-22.956 -62.939,-22.971 -62.9,-22.976 -58.5,-22.976 -58.461,-22.971 -58.424,-22.956 -58.393,-22.932 -51.418,-15.957 -51.394,-15.926 -51.379,-15.889 -51.374,-15.85 -51.374,-6.12 -38.194,-6.12 -35.901,-8.413 -35.901,-25.75 -35.896,-25.789 -35.887,-25.811 -35.881,-25.826 -35.857,-25.857 -34.107,-27.607 -34.076,-27.631 -34.039,-27.646 -34,-27.651 -4.5,-27.651 -4.461,-27.646 -4.424,-27.631 -4.393,-27.607 -4.369,-27.576 -4.354,-27.539 -4.349,-27.5 -4.349,-18.3 -4.354,-18.261 -4.369,-18.224 -4.393,-18.193 -5.691,-16.895 -5.691,-14.629 -0.879,-14.629 -0.51,-14.998 -0.51,-134.49 -89.49,-134.49 -89.49,-0.51 -56.989,-0.51
VCC_P1V2 on Ground Plane 2 (GND) (split plane): -38.376,-20.563 -38.376,-53.975 -38.371,-54.014 -38.362,-54.036 -38.356,-54.051 -38.332,-54.082 -2.076,-90.338 -2.076,-101.562 -4.413,-103.899 -14.262,-103.899 -16.149,-102.012 -16.149,-85.375 -16.154,-85.336 -16.169,-85.299 -16.193,-85.268 -53.199,-48.262 -53.199,-46.007 -53.194,-46.001 -53.179,-45.964 -53.174,-45.925 -53.174,-13.326 -45.613,-13.326
VCC_EXT_P5V0_P14V0 on Ground Plane 2 (GND) (split plane): -71.226,-18.25 -71.226,-19.837 -79.007,-27.618 -79.031,-27.649 -79.046,-27.686 -79.051,-27.725 -79.051,-78.674 -83.737,-78.674 -84.199,-78.212 -84.199,-74.863 -83.337,-74.001 -83.313,-73.97 -83.298,-73.933 -83.293,-73.894 -83.293,-19.026 -75.4,-19.026 -75.361,-19.021 -75.324,-19.006 -75.293,-18.982 -75.282,-18.968 -75.268,-18.957 -72.737,-16.426 -71.226,-16.426
VCC_P5V0 on Ground Plane 2 (GND) (split plane): -53.501,-48.325 -53.496,-48.364 -53.487,-48.386 -53.481,-48.401 -53.457,-48.432 -16.451,-85.438 -16.451,-102.012 -18.188,-103.749 -36.25,-103.749 -36.289,-103.754 -36.326,-103.769 -36.357,-103.793 -49.763,-117.199 -66.162,-117.199 -69.774,-113.587 -69.774,-56.65 -69.774,-23.088 -60.012,-13.326 -53.501,-13.326
VCC_P5V0 on Ground Plane 2 (GND) (split plane): -5.515,-15.117 -5.515,-16.975 -6.039,-17.499 -11.987,-17.499 -21.193,-8.293 -21.224,-8.269 -21.239,-8.263 -21.261,-8.254 -21.3,-8.249 -43.219,-8.249 -43.259,-8.254 -43.284,-8.265 -43.295,-8.269 -43.326,-8.293 -45.614,-10.581 -67.257,-10.581 -67.296,-10.586 -67.333,-10.601 -67.364,-10.625 -71.12,-14.381 -71.151,-14.394 -71.182,-14.418 -71.206,-14.449 -71.221,-14.486 -71.226,-14.525 -71.226,-16.124 -72.8,-16.124 -72.839,-16.129 -72.876,-16.144 -72.907,-16.168 -75.463,-18.724 -85.173,-18.724 -85.674,-18.223 -85.674,-16.163 -84.987,-15.476 -78.725,-15.476 -78.686,-15.471 -78.664,-15.462 -78.649,-15.456 -78.618,-15.432 -66.887,-3.701 -16.93,-3.701
VCC_P1V8 on Ground Plane 2 (GND) (split plane): -45.726,-11.675 -45.726,-13.024 -53.325,-13.024 -53.338,-13.025 -53.35,-13.024 -60.075,-13.024 -60.114,-13.029 -60.151,-13.044 -60.182,-13.068 -70.032,-22.918 -70.056,-22.949 -70.071,-22.986 -70.076,-23.025 -70.076,-56.65 -70.076,-62.275 -70.076,-113.587 -73.513,-117.024 -81.437,-117.024 -84.349,-114.112 -84.349,-100.638 -78.793,-95.082 -78.769,-95.051 -78.754,-95.014 -78.749,-94.975 -78.749,-27.788 -70.968,-20.007 -70.944,-19.976 -70.929,-19.939 -70.924,-19.9 -70.924,-14.613 -67.194,-10.883 -45.726,-10.883
GND on Ground Plane 2 (GND) (split plane): -0.51,-134.49 -89.49,-134.49 -89.49,-0.51 -54.412,-0.51 -54.398,-0.523 -54.256,-0.623 -54.105,-0.707 -53.944,-0.774 -53.778,-0.822 -53.607,-0.851 -53.434,-0.86 -43.434,-0.86 -43.261,-0.851 -43.09,-0.822 -42.924,-0.774 -42.763,-0.707 -42.612,-0.623 -42.47,-0.523 -42.456,-0.51 -21.578,-0.51 -21.564,-0.523 -21.422,-0.623 -21.271,-0.707 -21.11,-0.774 -20.944,-0.822 -20.773,-0.851 -20.6,-0.86 -10.6,-0.86 -10.427,-0.851 -10.256,-0.822 -10.09,-0.774 -9.929,-0.707 -9.778,-0.623 -9.636,-0.523 -9.622,-0.51 -0.51,-0.51
GND on Ground Plane 3 (GND) (split plane): -67.577,-21.573 -71.323,-21.573 -71.323,-17.627 -67.577,-17.627
GND on Ground Plane 3 (GND) (split plane): -0.51,-134.49 -89.49,-134.49 -89.49,-0.51 -54.412,-0.51 -54.398,-0.523 -54.256,-0.623 -54.105,-0.707 -53.944,-0.774 -53.778,-0.822 -53.607,-0.851 -53.434,-0.86 -43.434,-0.86 -43.261,-0.851 -43.09,-0.822 -42.924,-0.774 -42.763,-0.707 -42.612,-0.623 -42.47,-0.523 -42.456,-0.51 -21.578,-0.51 -21.564,-0.523 -21.422,-0.623 -21.271,-0.707 -21.11,-0.774 -20.944,-0.822 -20.773,-0.851 -20.6,-0.86 -10.6,-0.86 -10.427,-0.851 -10.256,-0.822 -10.09,-0.774 -9.929,-0.707 -9.778,-0.623 -9.636,-0.523 -9.622,-0.51 -0.51,-0.51

## Keep-outs
Keep-Out Layer:
  lines w0.1: -59.7,-0.3 -54.209,-0.3 ; -54.259,-0.3 -89.7,-0.3 -89.7,-134.7 -0.3,-134.7 -0.3,-0.3 -9.825,-0.3 cw(c-10.6,0.386) -10.6,-0.649 ; -43.434,-0.649 ccw(c-43.434,0.386) -42.658,-0.3 -21.375,-0.3 ccw(c-20.599,0.386) -20.599,-0.649 ; -54.209,-0.3 ccw(c-53.433,0.386) -53.433,-0.649 cw(c-53.433,0.386) -54.209,-0.3

## Other copper
Top Layer LF-Signals:
  pour cut-out: -71.87,-22.1 -63.8,-22.1 -63.8,-22.634 -71.87,-22.634
  pour cut-out: -71.87,-14.796 -71.87,-14.8 -70.8,-14.8 -70.8,-14.275 -71.944,-14.275
  pour cut-out: -71.667,-22.128 -71.667,-14.796 -72.4,-14.796 -72.4,-22.116
  pour cut-out: -56.447,-70.425 -51.397,-70.425 -51.397,-80.625 -56.447,-80.625
  pour cut-out: -55,-40 -35,-40 -35,-60 -55,-60
Bottom Layer LF-Signals:
  region net GND: -67.305,-20.75 -67.305,-19.921 -67.617,-19.921 -67.617,-20.75
  rectangle net VCC_EXT_P5V0_P14V0: -69.92,-17.675 -68.43,-17.473
  rectangle net NetL100_1: -69.925,-21.9 -68.418,-21.658
  region net GND: -50.607,-16.83 -48.657,-16.83 -47.857,-16.03 -47.857,-15.355 -47.907,-15.305 -49.532,-15.305 -49.707,-15.13 -49.707,-14.13 -49.632,-14.055 -48.807,-14.055 -48.757,-14.005 -48.757,-12.33 -48.782,-12.305 -49.607,-12.305 -49.707,-12.205 -49.707,-11.055 -49.632,-10.98 -47.907,-10.98 -47.857,-10.93 -47.857,-10.105 -48.207,-9.755 -50.607,-9.755
  region net VCC_P5V0: -53.107,-12.03 -52.432,-12.03 -52.007,-11.605 -50.857,-11.605 -50.857,-10.055 -52.182,-10.055 -53.107,-10.98
  region net GND: -55.107,-14.78 -54.857,-14.78 -54.857,-15.805 -53.382,-17.28 -53.382,-22.405 -55.107,-22.405
  region net NetL101_1: -55.382,-14.78 -55.382,-18.88 -55.457,-18.955 -56.582,-18.955 -56.882,-19.255 -56.882,-20.03 -57.232,-20.38 -61.007,-20.38 -61.457,-19.93 -61.457,-18.93 -61.057,-18.53 -56.007,-18.53 -55.807,-18.33 -55.807,-15.755 -55.582,-15.53 -55.582,-14.78
  region net VCC_P2V0: -55.457,-19.205 -55.357,-19.305 -55.357,-22.355 -55.432,-22.43 -61.132,-22.43 -61.332,-22.23 -61.332,-20.98 -60.982,-20.63 -57.132,-20.63 -56.667,-20.165 -56.667,-19.415 -56.457,-19.205
  region net VCC_P5V0: -55.882,-14.93 -55.882,-15.48 -56.007,-15.605 -56.007,-18.205 -56.082,-18.28 -59.932,-18.28 -60.107,-18.105 -60.107,-16.705 -58.332,-14.93
  region net VCC_P5V0: -55.882,-11.555 -55.882,-10.805 -56.007,-10.68 -56.007,-8.155 -56.082,-8.08 -59.932,-8.08 -60.107,-8.255 -60.107,-9.655 -58.307,-11.455 -57.357,-11.455 -57.257,-11.555
  region net VCC_P3V3: -55.457,-7.155 -55.357,-7.055 -55.357,-4.005 -55.432,-3.93 -61.132,-3.93 -61.332,-4.13 -61.332,-5.38 -60.982,-5.73 -57.132,-5.73 -56.667,-6.195 -56.667,-6.945 -56.457,-7.155
  region net NetL102_1: -55.382,-11.58 -55.382,-7.48 -55.457,-7.405 -56.582,-7.405 -56.882,-7.105 -56.882,-6.33 -57.232,-5.98 -60.607,-5.98 -60.932,-6.305 -60.932,-7.63 -60.732,-7.83 -56.007,-7.83 -55.782,-8.055 -55.782,-10.58 -55.582,-10.78 -55.582,-11.58
  region net GND: -55.107,-11.58 -54.857,-11.58 -54.857,-10.605 -53.307,-9.055 -53.307,-3.955 -55.107,-3.955
  region net VCC_P5V0: -53.582,-14.805 -53.582,-15.48 -53.432,-15.63 -52.982,-15.63 -52.032,-16.58 -51.007,-16.58 -50.857,-16.43 -50.857,-14.78 -50.907,-14.73 -52.057,-14.73 -52.457,-14.33 -53.107,-14.33 -53.107,-14.63 -53.282,-14.805
  pour cut-out: -72.625,-17.675 -72.625,-20.292 -72.617,-20.3 -70.9,-20.3 -70.9,-20.55 -70.908,-20.558 -72.95,-20.558 -72.95,-17.67
  pour cut-out: -64.05,-25.981 -63.849,-25.981 -63.849,-14.615 -64.05,-14.615
Ground Plane 1 (GND) (plane layer: these items are gaps in the copper):
  lines w0.5: -71.575,-21.825 -71.575,-17.375 -67.325,-17.375 -67.325,-21.825 -71.575,-21.825
Power Plane (VCC) (plane layer: these items are gaps in the copper):
  lines w0.3: -58.42,-5.969 -38.131,-5.969 -35.75,-8.35 -35.75,-25.75 -34,-27.5 -4.5,-27.5 -4.5,-18.3 -5.842,-16.958 -5.842,-14.478 -0.816,-14.478 -0.252,-15.042 ; -57.658,0 -56.837,0 -56.837,-5.975 -61.093,-5.975 -64.389,-9.271 -64.389,-21.336 -62.9,-22.825 -58.5,-22.825 -51.525,-15.85 -51.525,-5.969 -45.339,-5.969 ; -62,-57.05 -53.875,-65.175 -34.962,-65.175 -30.775,-60.988 -30.775,-36.125 -36.25,-30.65 -37.3,-29.6 -37.3,-10.15 -39.225,-8.225 -42.925,-8.225 -45.25,-10.55 -45.25,-23.925 -62,-40.675 -62,-57.05 ; -55,-60 -55,-40 -35,-40 -35,-60 -55,-60
Ground Plane 2 (GND) (plane layer: these items are gaps in the copper):
  lines w0.3: -83.444,-18.875 -83.444,-73.894 -84.35,-74.8 -84.35,-78.275 -83.8,-78.825 -78.95,-78.825 ; -75.4,-18.875 -85.236,-18.875 -85.825,-18.286 -85.825,-16.1 -85.05,-15.325 -78.725,-15.325 -66.95,-3.55 -57.575,-3.55 -16.868,-3.55 -5.364,-15.054 -5.364,-17.038 -5.976,-17.65 -12.05,-17.65 -21.3,-8.4 -43.219,-8.4 -45.575,-10.756 -45.575,-11.675 ; -75.375,-18.85 -72.8,-16.275 -71.075,-16.275 ; -71.075,-18.25 -71.075,-19.9 ; -69.925,-62.275 -69.925,-23.025 -60.075,-13.175 -53.35,-13.175 -53.35,-48.325 -16.3,-85.375 -16.3,-102.075 ; -69.925,-56.65 -69.925,-113.65 ; -53.325,-45.925 -53.325,-13.175 -45.575,-13.175 ; -71.075,-19.9 -71.075,-14.525 -71.05,-14.525 -67.257,-10.732 -45.575,-10.732 -45.575,-13.15 -38.225,-20.5 -38.225,-53.975 -1.925,-90.275 -1.925,-101.625 -4.35,-104.05 -14.325,-104.05 -16.3,-102.075 ; -71.075,-19.9 -78.9,-27.725 -78.9,-94.975 -84.5,-100.575 -84.5,-114.175 -81.5,-117.175 -73.45,-117.175 -69.925,-113.65 ; -69.925,-113.65 -66.225,-117.35 -49.7,-117.35 -36.25,-103.9 -18.125,-103.9 -16.3,-102.075
Ground Plane 3 (GND) (plane layer: these items are gaps in the copper):
  lines w0.5: -71.575,-21.825 -71.575,-17.375 -67.325,-17.375 -67.325,-21.825 -71.575,-21.825